# EAGLE board BluePill (EAGLE 9.6.2)
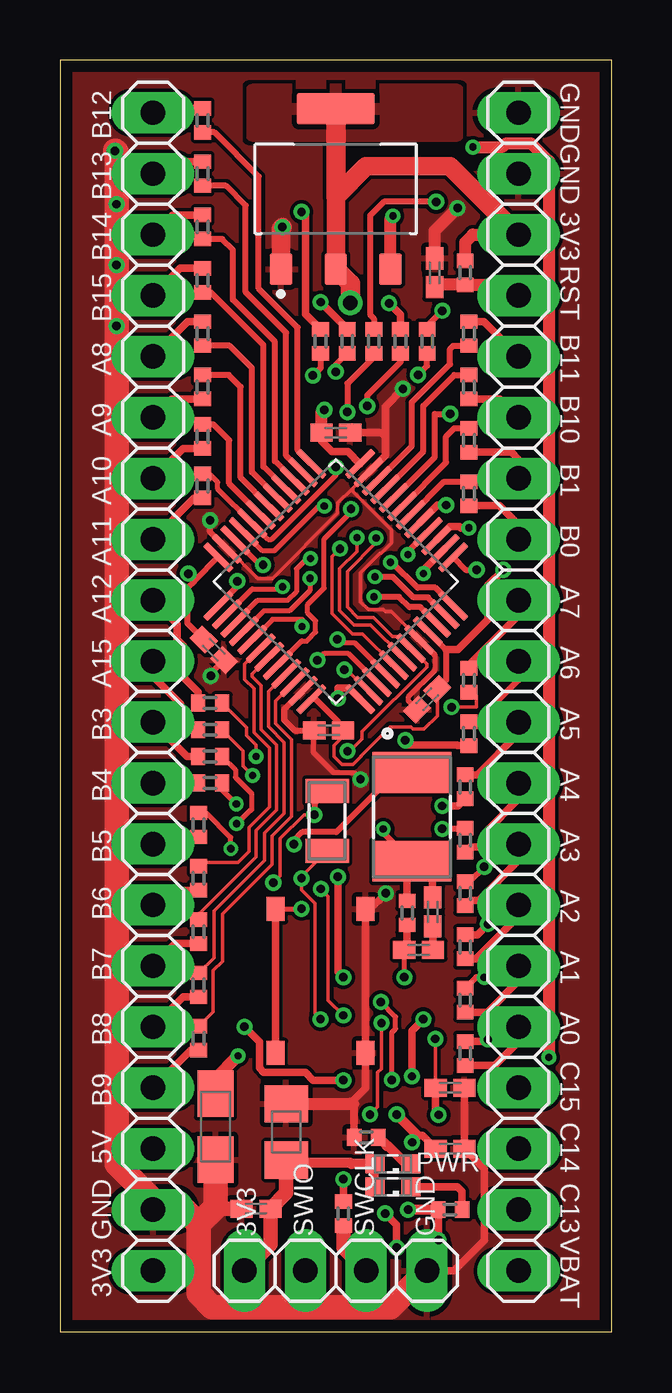
[diagram p0: board, top side]
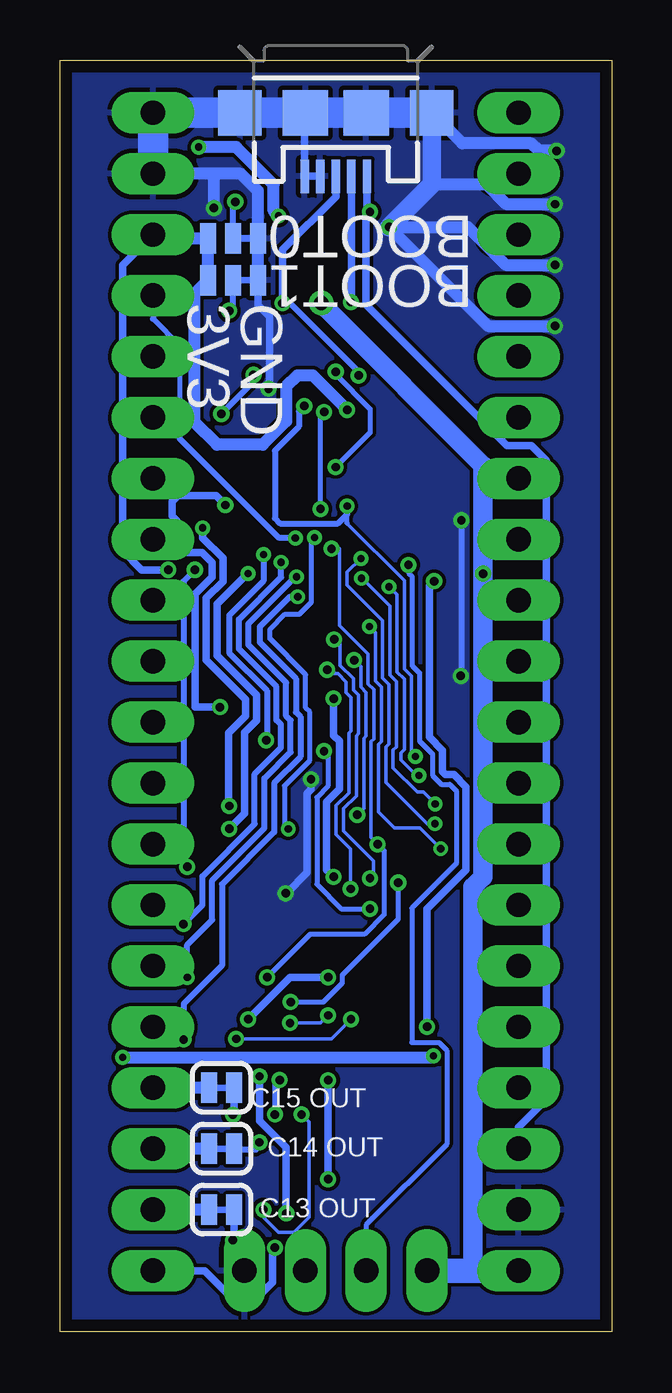
[diagram p1: board, bottom side, seen from below]

Size 23 x 53 mm. Coordinates in mm from the lower left corner, seen from the top.
Outline: 0,0 23,0 23,53 0,53 0,0
Copper layers (1*16): Top 0.035mm / dielectric 1.5mm / Bottom 0.035mm
Design rules "rb": minimum track width 0.15mm, minimum drill 0.3mm, track to track 0.15mm, track to pad 0.15mm, pad to pad 0.15mm, via to via 0.15mm, smd to smd 0.15mm, copper to edge 0.5mm, drill to drill 0.5mm, minimum pad ring 0.16mm, minimum via ring 0.16mm, stop-mask expansion 0.1mm, vias tented up to drill 0.4mm, thermal gap 0.2mm

## Footprints (pad centres in the part's own frame; a part is rotated, then mirrored left to right if it is on the bottom)
SMT-JUMPER_3_1-NC_TRACE_NO-SILK = smd 0.66 x 1.27: 1 -1.041,0; 2 0,0; 3 1.041,0
C0402K = smd 0.925 x 0.74: 1 -0.6,0; 2 0.6,0
A/3216-18R = smd 1.95 x 1.5: + 1.375,0; - -1.375,0
R/2012-12R = smd 1.55 x 1.8: + 1.175,0; - -1.175,0
SML0603 = smd 0.8 x 0.8: A 0.75,0; C -0.75,0
USB-MICROB = smd 1.4 x 0.35: D+ -2.65,0; D- -2.65,-0.65; GND -2.65,1.3; ID -2.65,0.65; VBUS -2.65,-1.3 | smd 1.9 x 1.8: MT1 0,-4; MT2 0,4 | smd 1.9 x 1.9: P$1 0,-1.27; P$2 0,1.27
1X20 = drill 1.016 long: 1 -24.13,0; 2 -21.59,0; 3 -19.05,0; 4 -16.51,0; 5 -13.97,0; 6 -11.43,0; 7 -8.89,0; 8 -6.35,0; 9 -3.81,0; 10 -1.27,0; 11 1.27,0; 12 3.81,0; 13 6.35,0; 14 8.89,0; 15 11.43,0; 16 13.97,0; 17 16.51,0; 18 19.05,0; 19 21.59,0; 20 24.13,0
1X04 = drill 1.016 long: 1 -3.81,0; 2 -1.27,0; 3 1.27,0; 4 3.81,0
SMT-JUMPER_2_NC_TRACE_SILK = smd 0.66 x 1.27: 1 -0.521,0; 2 0.521,0
3.2X1.5 = smd 1 x 1.8: 1 -1.25,0; 2 1.25,0
5.0X3.2_2 = smd 1.7 x 3.3: 1 -1.85,0; 2 1.85,0
R0402 = smd 0.6 x 0.7: 1 -0.5,0; 2 0.5,0
QFP50P900X900X160-48N = smd 1.56 x 0.28: 1 -4.18,2.75; 2 -4.18,2.25; 3 -4.18,1.75; 4 -4.18,1.25; 5 -4.18,0.75; 6 -4.18,0.25; 7 -4.18,-0.25; 8 -4.18,-0.75; 9 -4.18,-1.25; 10 -4.18,-1.75; 11 -4.18,-2.25; 12 -4.18,-2.75; 25 4.18,-2.75; 26 4.18,-2.25; 27 4.18,-1.75; 28 4.18,-1.25; 29 4.18,-0.75; 30 4.18,-0.25; 31 4.18,0.25; 32 4.18,0.75; 33 4.18,1.25; 34 4.18,1.75; 35 4.18,2.25; 36 4.18,2.75 | smd 0.28 x 1.56: 13 -2.75,-4.18; 14 -2.25,-4.18; 15 -1.75,-4.18; 16 -1.25,-4.18; 17 -0.75,-4.18; 18 -0.25,-4.18; 19 0.25,-4.18; 20 0.75,-4.18; 21 1.25,-4.18; 22 1.75,-4.18; 23 2.25,-4.18; 24 2.75,-4.18; 37 2.75,4.18; 38 2.25,4.18; 39 1.75,4.18; 40 1.25,4.18; 41 0.75,4.18; 42 0.25,4.18; 43 -0.25,4.18; 44 -0.75,4.18; 45 -1.25,4.18; 46 -1.75,4.18; 47 -2.25,4.18; 48 -2.75,4.18
SOT229P700X180-4N = smd 0.93 x 1.31: 1 -2.29,-3.345; 2 0,-3.345; 3 2.29,-3.345 | smd 3.24 x 1.31: 4 0,3.345
TS-1187A-B-A-B = smd 1 x 0.75: A -3,1.875; B 3,1.875; C -3,-1.875; D 3,-1.875

## Placement (x,y rotation side)
BOOT0  JUMPER-SMT_3_1-NC_TRACE_NO-SILK  [SMT-JUMPER_3_1-NC_TRACE_NO-SILK]  15.79,45.56 0 bottom
BOOT1  JUMPER-SMT_3_1-NC_TRACE_NO-SILK  [SMT-JUMPER_3_1-NC_TRACE_NO-SILK]  15.79,43.81 0 bottom
C1  1uF  [C0402K]  15.63,44.13 90 top
C2  10uF  [A/3216-18R]  6.48,8.54 90 top
C3  22uF  [R/2012-12R]  9.44,8.32 270 top
C4  100nF  [C0402K]  11.5,37.47 180 top
C5  100nF  [C0402K]  11.2,25.06 0 top
C6  100nF  [C0402K]  15.31,26.35 45 top
C7  100nF  [C0402K]  6.42,28.42 135 top
C8  100nF  [C0402K]  8.18,5.12 0 top
C9  20pF  [C0402K]  14.95,15.91 180 top
C10  20pF  [C0402K]  15.54,17.49 270 top
C11  20pF  [C0402K]  16.26,7.62 180 top
C12  20pF  [C0402K]  16.26,10.16 0 top
C13  GREEN  [SML0603]  13.88,6.03 180 top
J1  [USB-MICROB]  11.5,50.8 90 bottom
JP1  [1X20]  3.88,26.67 90 top
JP2  [1X20]  19.12,26.67 90 top
JP3  [1X04]  11.5,2.54 0 top
JP4  JUMPER-SMT_2_NC_TRACE_SILK  [SMT-JUMPER_2_NC_TRACE_SILK]  16.26,5.08 180 bottom
JP7  JUMPER-SMT_2_NC_TRACE_SILK  [SMT-JUMPER_2_NC_TRACE_SILK]  16.26,7.62 180 bottom
JP8  JUMPER-SMT_2_NC_TRACE_SILK  [SMT-JUMPER_2_NC_TRACE_SILK]  16.26,10.16 180 bottom
PWR  RED  [SML0603]  13.88,6.99 180 top
Q1  32.768kHz  [3.2X1.5]  11.14,21.29 90 top
Q2  8MHz  [5.0X3.2_2]  14.68,21.45 90 top
R1  220  [R0402]  17.06,34.92 270 top
R2  220  [R0402]  17.06,37.15 270 top
R3  10k  [R0402]  16.9,44.13 270 top
R4  220  [R0402]  6.26,23.97 180 top
R5  220  [R0402]  6.26,22.86 180 top
R6  220  [R0402]  5.79,21.11 270 top
R7  220  [R0402]  5.79,18.89 270 top
R8  220  [R0402]  5.79,16.67 270 top
R9  220  [R0402]  5.79,14.45 270 top
R10  220  [R0402]  5.79,12.22 270 top
R11  220  [R0402]  17.06,39.37 270 top
R12  220  [R0402]  17.06,41.59 90 top
R13  220  [R0402]  5.94,50.48 90 top
R14  220  [R0402]  5.94,48.26 90 top
R15  220  [R0402]  5.94,46.04 90 top
R16  220  [R0402]  5.94,43.81 90 top
R17  220  [R0402]  16.9,11.59 90 top
R18  220  [R0402]  16.9,13.81 90 top
R19  220  [R0402]  16.9,16.03 90 top
R20  220  [R0402]  16.9,18.26 90 top
R21  220  [R0402]  16.9,20.48 90 top
R22  220  [R0402]  16.9,22.7 270 top
R23  220  [R0402]  17.06,24.92 270 top
R24  220  [R0402]  17.06,27.15 270 top
R25  220  [R0402]  5.94,41.59 270 top
R26  220  [R0402]  5.94,39.37 90 top
R27  220  [R0402]  5.94,37.31 90 top
R28  220  [R0402]  5.94,35.24 90 top
R29  220  [R0402]  6.26,26.19 0 top
R30  1M  [R0402]  14.48,17.45 270 top
R31  220  [R0402]  11.82,4.92 90 top
R32  220  [R0402]  6.26,25.08 0 top
R33  100k  [R0402]  13.09,41.27 90 top
R34  100k  [R0402]  15.31,41.27 270 top
R35  20  [R0402]  14.2,41.27 90 top
R36  20  [R0402]  11.98,41.27 90 top
R37  4k7  [R0402]  10.87,41.27 90 top
R38  1k  [R0402]  12.77,8.1 180 top
R39  1k  [R0402]  16.26,5.08 180 top
U1  STM32F103C8T6  [QFP50P900X900X160-48N]  11.5,31.26 135 top
U2  AMS1117-3.3  [SOT229P700X180-4N]  11.5,47.62 0 top
U$1  TACTILE-SWITCH  [TS-1187A-B-A-B]  10.87,14.61 90 top

## Library data of the parts
BOOT0 BOOT1 JP4 JP7 JP8 = SparkFun-Jumpers
C1 C6-C12 = rcl; LCSC: C52923; SPICEPREFIX: C
C2 = rcl; LCSC: C7171; SPICEPREFIX: C
C3 = rcl; LCSC: C147776; SPICEPREFIX: C
C4 C5 = rcl; LCSC: C1525; SPICEPREFIX: C
C13 = led; LCSC: C72043
J1 = SparkFun-Connectors; PROD_ID: CONN-09505; SF_ID: PRT-08533
JP1-JP3 = pinhead
PWR = led; LCSC: C2286
Q1 = crystal-geyer_V1_0; LCSC: C32346
Q2 = crystal-geyer_V1_0; LCSC: C115962
R1 R2 R4-R29 R31 R32 = rcl; LCSC: C25091; SPICEPREFIX: R
R3 = rcl; LCSC: C25744; SPICEPREFIX: R
R30 = rcl; LCSC: C26083; SPICEPREFIX: R
R33 R34 = rcl; LCSC: C25741; SPICEPREFIX: R
R35 R36 = rcl; LCSC: C4109; SPICEPREFIX: R
R37 = rcl; LCSC: C25900; SPICEPREFIX: R
R38 R39 = rcl; LCSC: C11702; SPICEPREFIX: R
U1 = STM32F103C8T6; AVAILABILITY: Good; DESCRIPTION: ARM® Cortex®-M3 STM32F1 Microcontroller IC 32-Bit 72MHz 64KB (64K x 8) FLASH 48-LQFP (7x7); DIGIKEY-PURCHASE-URL: https://snapeda.com/shop?store=DigiKey&id=52195; LCSC: C8734; MF: STMicroelectronics; MOUSER-PURCHASE-URL: https://snapeda.com/shop?store=Mouser&id=52195; MP: STM32F103C8T6; PACKAGE: LQFP-48 STMicroelectronics; PRICE: None
U2 = AMS1117-3.3; AVAILABILITY: Unavailable; DESCRIPTION: Sot223/Pkg 1-Amp 3.3-Volt Low Drop Out Voltage Regulatator; LCSC: C6186; MF: Advanced Monolithic Systems; MP: AMS1117-3.3; PACKAGE: None; PRICE: None
U$1 = tactile; LCSC: C318884

## Nets
+3V3: BOOT0.1 BOOT1.1 C3.+ C4.2 C5.2 C6.2 C7.2 C8.2 C13.A JP1.1 JP2.18 JP3.1 PWR.A R3.1 U1.9 U1.24 U1.36 U1.48 U2.2 U2.4
+5V: J1.VBUS JP1.3 R37.2
A0: JP2.5 R17.1
A1: JP2.6 R18.1
A2: JP2.7 R19.1
A3: JP2.8 R20.1
A4: JP2.9 R21.1
A5: JP2.10 R22.1
A6: JP2.11 R23.1
A7: JP2.12 R24.1
A8: JP1.16 R25.1
A9: JP1.15 R26.1
A10: JP1.14 R27.1
A11: JP1.13 R28.1
A12: JP1.12 R29.1
A15: JP1.11 R32.1
B0: JP2.13 R1.2
B1: JP2.14 R2.2
B3: JP1.10 R4.2
B4: JP1.9 R5.2
B5: JP1.8 R6.2
B6: JP1.7 R7.2
B7: JP1.6 R8.2
B8: JP1.5 R9.2
B9: JP1.4 R10.2
B10: JP2.15 R11.2
B11: JP2.16 R12.2
B12: JP1.20 R13.2
B13: JP1.19 R14.2
B14: JP1.18 R15.2
B15: JP1.17 R16.2
BOOT0: R33.1 U1.44
BOOT1: R34.2 U1.20
C13: JP2.2 JP4.2
C14: JP2.3 JP7.2
C15: JP2.4 JP8.2
GND: BOOT0.3 BOOT1.3 C1.2 C2.- C3.- C4.1 C5.1 C6.1 C7.1 C8.1 C11.1 C12.2 J1.GND J1.ID J1.MT1 J1.MT2 J1.P$1 J1.P$2 JP1.2 JP2.19 JP2.20 JP3.4 R38.2 U1.8 U1.23 U1.35 U1.47 U2.1 U$1.C U$1.D
N$1: BOOT0.2 R33.2
N$2: BOOT1.2 R34.1
N$3: R1.1 U1.18
N$4: R2.1 U1.19
N$5: C9.1 C10.2
N$6: R4.1 U1.39
N$7: R5.1 U1.40
N$8: R6.1 U1.41
N$9: R7.1 U1.42
N$10: R8.1 U1.43
N$11: R9.1 U1.45
N$12: R10.1 U1.46
N$13: R11.1 U1.21
N$14: R12.1 U1.22
N$15: R13.1 U1.25
N$16: R14.1 U1.26
N$17: R15.1 U1.27
N$18: R16.1 U1.28
N$19: PWR.C R38.1
N$20: C13.C R39.1
N$25: J1.D- R36.2
N$26: R17.2 U1.10
N$27: R18.2 U1.11
N$28: R19.2 U1.12
N$29: R20.2 U1.13
N$30: R21.2 U1.14
N$31: R22.2 U1.15
N$32: R23.2 U1.16
N$33: R24.2 U1.17
N$34: R25.2 U1.29
N$35: R26.2 U1.30
N$36: R27.2 U1.31
N$40: R31.2 U1.37
N$41: R32.2 U1.38
N$45: J1.D+ R35.2 R37.1
PA11: R28.2 R36.1 U1.32
PA12: R29.2 R35.1 U1.33
PC13: JP4.1 R39.2 U1.2
PC14: C11.2 JP7.1 Q1.2 U1.3
PC15: C12.1 JP8.1 Q1.1 U1.4
PD0: C9.2 Q2.2 R30.2 U1.5
PD1: C10.1 Q2.1 R30.1 U1.6
RESET: C1.1 JP2.17 R3.2 U1.7 U$1.A U$1.B
SWCLK: JP3.3 R31.1
SWIO: JP3.2 U1.34
VBAT: JP2.1 U1.1
VCC: C2.+ U2.3

## Tracks (layer width: path | path; a pad name or v marks a point on that pad's centre or on a via)
+3V3  (via drill 0.35, 0.6)
  Top 0.152: C5.2 11.8,24.8 11.43,24.43 11.43,23.96 11.76,23.63 12.22,23.63 12.55,23.96 12.55,23.99 13.77,25.21 14.63,25.21 14.73,25.11 15.18,25.11 15.73,25.67 C6.2
  Top 0.203: 5.61,31.29 5.61,31.33 v5.36,31.59
  Top 0.254: U1.9 16.1,28.43 16.1,27.15 C6.2 | U1.48 10.65,26.36 11.61,25.4 11.48,25.4 11.48,25.38 C5.2 | U1.36 5.61,31.29 5.31,30.98 5.31,29.53 C7.2 | C3.+ 9.54,7.04
  Top 0.305: U1.24 12,36.67 11.34,36.67 10.9,37.11 C4.2 | PWR.A C13.A | 16.1,28.43 16.59,28.43 17.85,29.69 17.85,31.12 v18.48,31.75
  Top 0.406: PWR.A 12.16,6.99 12.1,7.04 9.54,7.04
  Top 0.508: R3.1 16.9,45.4 17.21,45.72 JP2.18 | C4.2 10.9,38.29 v11.02,38.42
  Top 0.61: C3.+ 9.44,5.78 C8.2 8.78,3.63 JP3.1
  Top 0.762: U2.2 11.5,47.31 12.77,48.58 16.26,48.58 JP2.18
  Top 0.813: U2.2 12.11,43.67 v12.11,42.87 | 11.5,47.31 U2.4
  Bottom 0.305: v18.48,31.75 19.6,31.75 20.39,32.54 20.39,44.45 JP2.18
  Bottom 0.508: JP2.18 18.96,45.56 BOOT0.1 BOOT1.1 17.4,43.24 17.4,37.91 16.45,36.96 14.54,36.96 13.56,37.94 13.56,39.38 13.1,39.85 12.45,39.85 v11.02,38.42
  Bottom 0.813: v12.11,42.87 11.91,42.67 11.91,42.65 5.36,36.09 v5.36,31.59 5.36,18.95 5.79,18.52 5.79,2.54
  Bottom 1.016: JP1.1 5.79,2.54 JP3.1
  pour Top: 8.01,49.85 16.58,49.85 16.58,51.75 8.01,51.75
+5V  (via drill 0.35)
  Top 0.305: R37.2 10.23,42.41 10.23,46.51 v10.07,46.67
  Bottom 0.305: J1.VBUS 10.2,46.8 v10.07,46.67 10.23,46.51 10.23,42.8 4.36,36.93 3.35,36.93 2.71,36.3 2.71,9.68 3.88,8.51 JP1.3
A0
  Top 0.305: R17.1 18.14,11.09 19.12,12.06 JP2.5
A1
  Top 0.305: R18.1 17.83,13.31 19.12,14.61 JP2.6
A2
  Top 0.305: R19.1 17.35,15.53 19.12,17.3 JP2.7
A3
  Top 0.305: R20.1 17.12,17.97 17.46,17.97 19.12,19.63 JP2.8
A4
  Top 0.305: JP2.9 19.12,22.2 17.73,20.81 17.73,20.48 17.45,20.2 17.12,20.2 R21.1
A5
  Top 0.305: R22.1 17.4,23.2 19.12,24.92 JP2.10
A6
  Top 0.254: R23.1 17.4,25.42 19.12,27.15 JP2.11
A7
  Top 0.305: JP2.12 19.12,29.84 17.06,27.78 R24.1 | R24.1
A8
  Top 0.305: R25.1 5.33,42.09 JP1.16
A9
  Top 0.305: R26.1 4.65,38.87 JP1.15
A10
  Top 0.305: R27.1 5.13,36.81 JP1.14
A11
  Top 0.305: R28.1 5.6,34.74 JP1.13
A12
  Top 0.305: R29.1 5.76,26.65 5.15,27.27 5.15,28.58 4.88,28.85 4.88,29.48 JP1.12
A15
  Top 0.305: JP1.11 3.88,27.3 5.04,26.15 5.04,25.59 5.54,25.08 R32.1
B0
  Top 0.305: JP2.13 19.12,33.63 18.33,34.42 R1.2
B1
  Top 0.305: R2.2 18.83,36.65 19.12,36.35 JP2.14
B3
  Top 0.305: R4.2 5.31,23.97 JP1.10
B4
  Top 0.305: R5.2 JP1.9
B5
  Top 0.305: R6.2 4.17,20.61 JP1.8
B6
  Top 0.305: R7.2 4.49,18.39 JP1.7
B7
  Top 0.305: R8.2 4.81,16.17 JP1.6
B8
  Top 0.305: R9.2 5.13,13.95 JP1.5
B9
  Top 0.305: R10.2 5.44,11.72 JP1.4
B10
  Top 0.305: R11.2 18.35,38.87 JP2.15
B11
  Top 0.305: R12.2 17.67,42.09 JP2.16
B12
  Top 0.305: R13.2 4.06,50.98 JP1.20
B13
  Top 0.305: R14.2 4.38,48.76 JP1.19
B14
  Top 0.305: R15.2 4.7,46.54 JP1.18
B15
  Top 0.305: R16.2 5.01,44.31 JP1.17
BOOT0  (via drill 0.35)
  Top 0.203: U1.44 10.08,28.79 10.31,28.79 10.31,28.81 10.66,29.16 10.66,29.62 10.33,29.95 10.33,30.3 11.01,30.98 11.01,33.03 12.14,34.16 | v12.14,34.29 12.14,34.16 | 12.14,34.16
  Top 0.254: R33.1 13.09,40.62 11.98,39.51 v11.98,38.33
  Bottom 0.203: v12.14,34.29 12.14,38.17 v11.98,38.33
BOOT1  (via drill 0.35)
  Top 0.254: U1.20 15.63,36.45 15.63,38.25 v16.27,38.25 | v14.93,39.87 15.31,40.25 R34.2
  Bottom 0.254: v16.27,38.25 14.93,39.59 v14.93,39.87
C13
  Bottom 0.508: JP4.2 JP2.2
C14
  Bottom 0.508: JP7.2 JP2.3
C15
  Bottom 0.508: JP8.2 JP2.4
GND  (via drill 0.35)
  Top 0.152: U1.35 7,32.63 8.23,31.39 8.86,31.39 11.57,34.11 11.57,34.52 12.21,35.16 | 12.21,35.16 U1.23 | 12.21,35.16 12.21,35.01 13.82,33.4 13.82,32.86 13.4,32.45 13.34,32.45 12.54,31.64 12.54,30.41 12.87,30.09 13.48,30.09 13.56,30 13.82,30 U1.8
  Top 0.203: 15.63,28.2 15.63,27.55 14.52,26.44 14.52,26.3 C6.1 | v12.53,23.02 12.25,23.3 11.41,23.3 10.56,24.15 10.56,25.02
  Top 0.254: U1.8 15.63,28.2 | U1.47 9.35,25.93 9.35,25.49 9.78,25.06 C5.1 | U1.35 6.26,33.32 v6.26,33.81 | 6.29,27.43 C7.1 | v6.29,27.33 6.29,27.43 | 6.29,27.43
  Top 0.305: U1.23 13.56,36.51 13.56,37.31 | 13.56,37.31 13.4,37.47 C4.1 | JP3.4 16.42,2.54 17.69,3.81 17.69,6.79 C11.1 C12.2 | R38.2 12.27,9.44 12.32,9.49 | 12.1,9.49 12.74,10.13 U$1.C U$1.D 12.93,17.61 v13.59,18.26 | 13.56,37.31 13.56,38.55 v14.3,39.29 | C5.1 10.56,25.02
  Top 0.508: C1.2 15.63,45.88 v16.58,46.83 | C3.- 12.1,9.49
  Top 0.61: C8.1 6.55,5.12 6.48,5.18
  Top 0.762: U2.1 9.21,45.97 v9.28,46.04
  Top 1.016: 5.79,4.49 5.19,5.08 JP1.2 3.88,5.47 2.36,6.99 v2.36,41.91 v2.36,44.45 v2.36,46.99 2.36,49.15 v2.29,49.21 | 5.79,4.49 5.79,1.59 6.35,1.02 13.79,1.02 JP3.4 | C2.- 6.48,5.18 5.79,4.49
  Bottom 0.254: v6.29,27.33 6.26,27.36 v6.26,33.81
  Bottom 0.305: J1.P$2 12.8,50.77 J1.GND J1.ID | v14.3,39.29 14.3,39.55 14.27,39.59 14.27,42.3 14.74,42.77 BOOT1.3 | v12.53,23.02 12.53,22.6 12.69,22.43 12.69,19.13 13.56,18.26 v13.59,18.26
  Bottom 0.508: 16.74,48.26 16.58,48.1 v16.58,46.83 | 16.74,48.26 JP2.19 | BOOT1.3 BOOT0.3 14.74,47.54 15.47,48.26 16.74,48.26 | v2.29,49.21 3.04,49.21 3.36,49.53 6.23,49.53 J1.MT1 | 7.5,47.81 5.23,47.81 4.41,46.99 v2.36,46.99 | v2.36,44.45 4.41,44.45 5.99,46.04 v9.28,46.04 5.15,41.91 v2.36,41.91
  Bottom 0.762: v9.28,46.04 7.5,47.81 J1.MT1
  Bottom 1.27: J1.MT1 J1.P$1 J1.P$2 J1.MT2 JP2.20 JP2.19
  pour Top (rank 2): -0.25,53.18 23.25,53.18 23.25,-0.16 -0.25,-0.16
  pour Bottom: -0.41,53.34 23.41,53.34 23.41,-0.32 -0.41,-0.32
N$1  (via drill 0.35)
  Top 0.254: R33.2 13.09,42.23 12.93,42.39 12.93,46.51 13.5,47.09 v15.69,47.09
  Bottom 0.254: BOOT0.2 15.79,46.99 v15.69,47.09
N$2  (via drill 0.35)
  Top 0.254: v15.95,42.55 15.18,41.77 R34.1
  Bottom 0.254: v15.95,42.55 15.79,42.55 BOOT1.2
N$3
  Top 0.254: U1.18 16.02,35.42 R1.1
N$4
  Top 0.254: U1.19 16.1,36.22 16.1,37.31 16.45,37.65 R2.1
N$5
  Top 0.305: C10.2 15.55,16.87 C9.1
N$6  (via drill 0.3 pad 0.45)
  Top 0.203: R4.1 7.31,23.42 7.31,23.1 8.01,22.4 8.01,21.75 7.95,21.75 v7.37,21.16 | U1.39 8.24,30.48 9.51,30.48 9.86,30.82 9.86,31.78 10.29,32.22 v10.45,32.22
  Bottom 0.152: v10.45,32.22 11.02,31.65 11.02,31.11 9.55,29.64 9.55,27.25 9.28,26.98 9.28,24.48 9.41,24.36 9.41,22.89 7.68,21.16 v7.37,21.16
N$7  (via drill 0.3 pad 0.45)
  Top 0.203: R5.1 6.76,22.58 v7.35,21.99 | U1.40 8.51,30.04 9.57,30.04 10.42,30.89 v10.42,31.4
  Bottom 0.152: v7.35,21.99 7.85,22.48 8.1,22.48 9.1,23.49 9.1,24.23 8.96,24.37 8.96,27.09 9.25,27.37 9.25,30.23 v10.41,31.4 v10.42,31.4
N$8  (via drill 0.3 pad 0.45)
  Top 0.203: v7.12,20.12 7.12,20.6 6.11,21.61 R6.1 | U1.41 8.86,29.69 10.1,29.69 v10.1,29.39
  Bottom 0.152: v7.12,20.12 7.99,20.99 9.04,20.99 9.72,21.66 9.72,24.47 9.6,24.59 9.6,26.86 9.85,27.12 9.85,29.14 v10.1,29.39
N$9
  Top 0.152: R7.1 5.94,19.55 7.43,19.55 7.88,20 7.88,21.02 8.74,21.87 8.74,24.32 8.09,24.97 8.09,26.8 7.71,27.18 7.71,27.82 U1.42
N$10
  Top 0.152: 5.79,17.39 8.18,19.78 8.18,20.89 9.04,21.75 9.04,24.44 8.39,25.09 8.39,26.92 8.01,27.3 8.01,27.42 U1.43
  Top 0.203: 5.79,17.39 R8.1
N$11
  Top 0.152: R9.1 6.42,15.58 6.42,17.52 8.52,19.62 8.52,20.77 9.35,21.6 9.35,24.56 8.69,25.22 8.69,26.69 U1.45
N$12
  Top 0.152: R10.1 6.39,13.32 6.39,15.05 6.77,15.44 6.77,17.4 8.84,19.47 8.84,20.65 9.66,21.47 9.66,24.68 9,25.34 9,26.28 U1.46
N$13
  Top 0.254: U1.21 15.15,36.68 15.15,38.58 16.45,39.87 R11.1
N$14
  Top 0.254: U1.22 14.68,36.91 14.68,38.73 16.26,40.32 16.26,40.96 16.4,41.09 R12.1
N$15
  Top 0.254: U1.25 9.91,36.74 9.91,41.85 8.29,43.48 8.29,48.14 6.44,49.98 R13.1
N$16
  Top 0.254: U1.26 9.44,36.51 9.44,41.63 7.75,43.32 7.75,46.93 6.92,47.76 R14.1
N$17
  Top 0.254: U1.27 8.96,36.28 8.96,41.25 7.21,43 7.21,45.09 6.76,45.54 R15.1
N$18
  Top 0.254: U1.28 8.48,36.05 8.48,41.12 6.29,43.31 R16.1
N$19
  Top 0.406: R38.1 13.63,7.74 13.68,7.74 14.43,6.99 PWR.C
N$20
  Top 0.305: C13.C 16.58,6.03 16.76,5.85 R39.1
N$25  (via drill 0.35)
  Top 0.305: R36.2 11.98,41.8 v10.87,42.91
  Bottom 0.305: J1.D- 10.85,42.93 v10.87,42.91
N$26  (via drill 0.3 pad 0.45, 0.35)
  Top 0.254: U1.10 15.04,30.2 14.57,30.2 14.14,30.62 v13.09,30.62
  Top 0.305: R17.2 17.76,12.09 v17.84,12.17
  Bottom 0.254: v13.09,30.62 13.42,30.62 14.68,29.37 14.68,28.73 13.16,27.22 13.16,25.82 12.97,25.63 12.97,23.95 14.07,22.86 14.07,20.82 16.25,18.64 16.25,15.25 17.84,13.66 v17.84,12.17
N$27  (via drill 0.3 pad 0.45)
  Top 0.254: U1.11 15.34,30.6 14.74,30.6 13.88,31.46 v13.14,31.46 | R18.2 17.35,14.76 v17.69,14.76
  Bottom 0.254: v17.69,14.76 17.69,16.12 16.65,17.16 16.65,18.81 14.47,20.99 14.47,23.06 13.38,24.15 13.38,25.47 13.56,25.66 13.56,27.05 15.14,28.62 15.14,29.51 13.19,31.46 v13.14,31.46
N$28  (via drill 0.3 pad 0.45, 0.35)
  Top 0.254: U1.12 15.65,31 14.91,31 13.85,32.06 v13.78,32.06
  Top 0.305: R19.2 17.4,16.53 v17.85,16.99
  Bottom 0.254: v17.85,16.99 17.06,17.78 17.06,18.98 14.88,21.16 14.88,23.25 13.79,24.34 13.79,25.3 13.97,25.49 13.97,26.88 15.54,28.45 15.54,29.68 13.78,31.44 v13.78,32.06
N$29  (via drill 0.35)
  Top 0.254: U1.13 16.92,31.75 v17.37,31.75 | v17.69,19.37 17.08,18.76 R20.2
  Bottom 0.254: v17.37,31.75 17.85,31.27 17.85,19.53 v17.69,19.37
N$30  (via drill 0.3 pad 0.45, 0.35)
  Top 0.254: v15.95,20.95 15.97,20.98 R21.2
  Top 0.305: U1.14 15.08,31.66 v15.15,31.59
  Bottom 0.305: v15.15,31.59 15.17,31.59 16.44,30.32 16.44,28.18 14.8,26.54 14.8,25.47 15.31,24.97 15.31,21.59 v15.95,20.95
N$31  (via drill 0.3 pad 0.45, 0.35)
  Top 0.305: R22.2 16.6,21.91 v15.95,21.91 | v17.06,33.5 16.71,33.5 16.65,33.55 16.26,33.55 U1.15
  Bottom 0.305: v17.06,33.5 17.06,33.08 16.21,32.23 16.21,31.27 16.9,30.58 16.9,27.99 15.26,26.35 15.26,25.66 15.96,24.95 15.96,21.91 v15.95,21.91
N$32  (via drill 0.3 pad 0.45, 0.35)
  Top 0.203: v14.52,32.38
  Top 0.254: U1.16 14.52,32.51 v14.52,32.38
  Top 0.305: R23.2 16.58,24.42 16.55,24.45 14.4,24.45 v14.4,24.64
  Bottom 0.254: v14.52,32.38 14.52,31.27 15.95,29.84 15.95,28.29 14.37,26.71 14.37,24.67 v14.4,24.64
N$33  (via drill 0.35)
  Top 0.152: v16.33,26.03 v16.33,26.04 17.37,26.04 17.37,26.51 17.24,26.65 R24.2
  Top 0.305: U1.17 15.75,34.45 v16.1,34.45
  Bottom 0.254: v16.33,26.03 v16.33,26.04
  Bottom 0.305: v16.1,34.45 16.49,34.84 18.08,34.84 18.32,34.6 18.32,33.98 17.88,33.53 17.88,32.67 17.67,32.46 17.08,32.46 16.66,32.05 16.66,31.45 17.37,30.74 17.37,26.04 v16.33,26.04
N$34
  Top 0.254: U1.29 8.01,35.82 8.01,40.16 7.08,41.09 R25.2
N$35
  Top 0.254: U1.30 7.53,35.59 7.53,39.37 7.03,39.87 R26.2
N$36
  Top 0.254: U1.31 7.05,35.35 7.05,37.15 6.4,37.81 R27.2
N$40  (via drill 0.35)
  Top 0.254: v7.39,31.28 7.39,31.05 U1.37
  Top 0.305: R31.2 v11.82,6.35 | v11.82,10.48 10.55,10.48 10.23,10.8 8.49,10.8 8.31,10.98 8.31,12.08 v7.69,12.7
  Bottom 0.305: v11.82,6.35 v11.82,10.48 | v7.69,12.7 7.69,17.62 6.06,19.25 6.06,22.7 6.58,23.21 6.93,23.21 7.05,23.34 7.05,24.23 7.6,24.77 7.6,31.07 v7.39,31.28
N$41  (via drill 0.3 pad 0.45)
  Top 0.152: v8.03,23.18 7.64,23.56 7.64,24.2 R32.2
  Top 0.203: U1.38 8.01,30.96 9.28,30.96 v9.28,31.04
  Bottom 0.152: v8.03,23.18 8.14,23.18 8.79,23.82 8.79,24.12 8.64,24.26 8.64,27.2 8.95,27.5 8.95,30.71 v9.28,31.04
N$45  (via drill 0.35)
  Top 0.254: R37.1 10.87,40.16 v10.55,39.85
  Top 0.305: R35.2 14.2,42.39 v13.72,42.86
  Bottom 0.254: v13.72,42.86 13.4,42.86 10.55,40.01 v10.55,39.85
  Bottom 0.305: J1.D+ 11.5,47.31 13.72,45.09 v13.72,42.86
PA11  (via drill 0.35)
  Top 0.203: v11.51,36.03 11.51,35.69 8.83,33.02 8.68,33.02 U1.32 6.58,35.12 6.58,35.4 6.24,35.74 R28.2 | 11.5,40.3 v11.5,40.01
  Top 0.254: R36.1 11.5,40.3
  Bottom 0.203: v11.51,36.03 10.07,37.47 10.07,38.45 11.5,39.88 v11.5,40.01
PA12  (via drill 0.3 pad 0.45, 0.35)
  Top 0.152: R29.2 7.79,25.17 7.79,24.84 8.18,24.45 v8.18,23.97
  Top 0.203: v11.02,34.41 10.8,34.41 8.93,32.54 8.45,32.54 U1.33
  Top 0.254: R35.1 14.2,40.41 12.81,39.03 v12.81,38.58
  Bottom 0.152: 11.02,33.68 8.64,31.3 8.64,27.62 8.34,27.32 8.34,24.13 v8.18,23.97
  Bottom 0.203: 11.02,33.68 v11.02,34.41
  Bottom 0.254: v11.02,34.41 11.02,34.06 11.41,33.68 13.82,33.68 14.04,33.9 14.04,36.71 13.03,37.72 13.03,38.36 v12.81,38.58
PC13  (via drill 0.35)
  Top 0.152: U1.2 12.83,26.72 11.97,27.58 v11.86,27.58 | v10.88,18.45 11.18,18.14 11.18,13.81 v11.82,13.18 | v13.4,12.86 13.4,10.95 13.25,10.79 13.25,9.37 v12.93,9.05
  Top 0.305: v15.79,3.81 15.79,5.06 R39.2
  Top 0.406: R39.2 v14.52,5.08
  Bottom 0.152: v11.86,27.58 11.86,27.42 11.41,27.42 11.07,27.08 11.07,26.63 10.87,26.42 10.87,25.04 10.96,24.94 10.96,22.46 11.49,21.92 11.49,20.73 10.88,20.11 v10.88,18.45 | v11.82,13.18 12.13,12.86 v13.4,12.86 | v12.93,9.05 12.61,8.73 12.61,4.76 13.25,4.13 13.88,4.13 14.52,4.76 v14.52,5.08
  Bottom 0.305: JP4.1 15.74,3.85 v15.79,3.81
PC14  (via drill 0.35)
  Top 0.152: v10.61,21.54 10.18,21.54 9.18,20.54 9.18,18.99 v8.9,18.71
  Top 0.203: U1.3 12.03,28.26 11,28.26 v10.73,27.98 | v13.84,10.48 13.84,12.46 13.99,12.62 13.99,13.12 v13.38,13.73
  Top 0.254: Q1.2 10.61,22 v10.61,21.54 | 14.91,8.18 14.91,8.12 v14.68,7.89
  Top 0.305: 14.91,8.18 15.11,8.18 C11.2
  Top 0.406: v14.04,9.05 14.91,8.18
  Bottom 0.152: v10.73,27.98 10.46,27.71 10.46,26.87 10.23,26.64 10.23,24.82 10.33,24.71 10.33,21.8 v10.6,21.54 v10.61,21.54
  Bottom 0.203: v14.04,9.05 14.04,10.28 v13.84,10.48 | v13.38,13.73 12.02,13.73 11.23,14.52 11.23,14.85 8.9,17.18 v8.9,18.71
  Bottom 0.254: 15.79,7.58 14.83,7.58 14.68,7.73 v14.68,7.89
  Bottom 0.305: 15.79,7.58 JP7.1
PC15  (via drill 0.35)
  Top 0.152: Q1.1 10.07,18.97 v10.07,18.89 10.07,18.41 10.63,17.85 10.63,13.25 v10.87,13.02 | C12.1 15.66,12.19 v15.65,12.2
  Top 0.203: U1.4 12.3,28.69 11.73,28.69 v11.57,28.85
  Top 0.305: C12.1 15.66,9.15 v15.79,9.03
  Bottom 0.152: v11.57,28.85 11.46,28.85 11.32,28.71 11.32,27.77 10.76,27.21 10.76,26.75 10.55,26.53 10.55,24.93 10.64,24.83 10.64,22.33 11.17,21.8 11.17,20.86 9.93,19.61 9.93,19.03 v10.07,18.89 | v15.65,12.2 11.68,12.2 v10.87,13.02
  Bottom 0.305: v15.79,9.03 15.74,9.07 JP8.1
PD0  (via drill 0.35)
  Top 0.152: U1.5 12.62,29.08 12.2,29.08 11.35,29.93 11.35,32.3 v11.68,32.63
  Top 0.203: v14.36,14.76 v14.35,14.77 C9.2
  Top 0.254: v9.75,20.31 9.75,20.48 10.09,20.82 11.52,20.82 14,23.3 Q2.2
  Top 0.305: R30.2 14.48,16.03 C9.2
  Bottom 0.152: v11.68,32.63 11.34,32.63 11.34,29.42 10.15,28.23 10.15,27 9.91,26.75 9.91,24.7 10.03,24.59 10.03,20.58 v9.75,20.31
  Bottom 0.203: v14.36,14.76 12.56,16.56 10.3,16.56 9.48,17.38 9.48,20.04 v9.75,20.31
PD1  (via drill 0.3 pad 0.45)
  Top 0.152: U1.6 12.95,29.46 12.26,29.46 11.67,30.05 11.67,31.8 12.38,32.51 v12.38,33.09
  Top 0.254: Q2.1 13.41,20.88 v13.48,20.95
  Top 0.305: R30.1 14.48,19.4 Q2.1 15.39,19.6 15.54,19.46 C10.1
  Bottom 0.203: v13.48,20.95 13.64,21.11 13.64,22.75 12.58,23.81 12.58,25.81 12.76,25.99 12.76,27.39 14.25,28.88 14.25,29.26 13.6,29.9 13.01,29.9 12.51,30.41 12.51,32.96 v12.38,33.09
RESET  (via drill 0.3 pad 0.45, 0.35)
  Top 0.152: v13.19,33.08 13.19,32.88 11.98,31.68 11.98,30.19 12.41,29.76 13.08,29.76 13.86,28.98 14.14,28.98 U1.7 15.3,27.82 15.3,27.7 12.6,25 12.6,24.7 12.1,24.19 v11.99,24.19
  Top 0.203: U$1.B 10.05,17.61 v10.07,17.62
  Top 0.305: U$1.A U$1.B
  Top 0.508: JP2.17 18.67,43.63 R3.2 15.73,43.63 C1.1
  Bottom 0.203: v10.07,17.62 11.27,17.62 12.29,18.64 12.29,22.27 11.82,22.73 11.82,24.03 v11.99,24.19 | 19.12,42.22 18,41.1 18,40.18 18.01,40.17 18.01,38.57 18,38.56 18,37.22
  Bottom 0.254: v13.19,33.08 13.86,33.08 18,37.22 | JP2.17 19.12,42.22
SWCLK
  Top 0.61: R31.1 11.82,3.49 JP3.3
SWIO  (via drill 0.35)
  Top 0.203: U1.34 8.33,31.95 v8.47,31.95
  Bottom 0.203: v8.47,31.95 8.47,31.62 8.3,31.46 8.3,27.75 8.01,27.45 8.01,24.61 7.46,24.06 7.46,23.18 7.1,22.81 6.75,22.81 6.47,22.54 6.47,19.5 8.33,17.65 8.33,12.05 7.2,12.05 6.87,11.72 6.87,7.81 10.23,4.45 JP3.2
VBAT  (via drill 0.35)
  Top 0.305: U1.1 12.04,26.83 11.59,26.83 v11.59,26.38 | v11.59,18.95 11.59,14.99 v11.82,14.76 | v15.15,13.02 14.68,12.54 v14.68,10.64 | v13.56,4.92 14.04,4.45 v14.04,3.49
  Bottom 0.305: v11.59,26.38 11.59,24.85 11.34,24.61 11.34,22.62 11.88,22.08 11.88,19.25 v11.59,18.95 | v11.82,14.76 13.4,14.76 v15.15,13.02 | v13.56,4.92 13.56,7.67 14.68,8.79 14.68,9.31 v14.68,10.64 | v14.04,3.49 14.14,3.39 14.14,2.06 14.83,1.37 15.79,1.37 16.96,2.54 JP2.1
VCC  (via drill 0.3 pad 0.45)
  Top 0.508: U2.3 13.79,46.41 v13.88,46.5 | v17.21,49.37 18.44,49.37 18.59,49.53 19.64,49.53 20.39,48.78 v20.39,11.43 | C2.+ 6.48,10.54 v7.43,11.48
  Bottom 0.508: v13.88,46.5 14.09,46.71 14.09,47.81 15.65,49.37 v17.21,49.37 | v7.43,11.48 7.48,11.43 v20.39,11.43

## Text on the board
tNames: GND | B12 | GND | B13 | 3V3 | B14 | RST | B15 | B11 | A8 | B10 | A9 | B1 | A10 | B0 | A11 | A7 | A12 | A6 | A15 | A5 | B3 | A4 | B4 | A3 | B5 | A2 | B6 | A1 | B7 | A0 | B8 | C15 | B9 | C14 | 5V | PWR | C13 | GND | 3V3 | SWIO | SWCLK | GND | VBAT | 3V3
bNames: BOOT0 | BOOT1 | GND | 3V3 | C15 OUT | C14 OUT | C13 OUT